# EAGLE board Home Automation Using IR Sensor (EAGLE 9.7.0)

Size 176.57 x 143.27 mm. Coordinates in mm from the lower left corner, seen from the top.
Outline: 0,0 176.57,0 176.57,143.27 0,143.27 0,0
Copper layers (1*16): Top 0.035mm / dielectric 1.5mm / Bottom 0.035mm
Design rules "default": minimum track width 6mil, minimum drill 0.35mm, track to track 6mil, track to pad 6mil, pad to pad 6mil, via to via 6mil, smd to smd 6mil, copper to edge 40mil, drill to drill 6mil, minimum pad ring 10mil, minimum via ring 8mil, stop-mask expansion 4mil, vias tented up to drill 0mil, thermal gap 10mil

## Footprints (pad centres in the part's own frame; a part is rotated, then mirrored left to right if it is on the bottom)
LED-RGB-5MM = drill 0.9: B 0.635,0.635; C -0.635,-0.635; G 1.905,-0.635; R -1.905,0.635
LU-5-R = drill 0.8: 1 -6.35,-3.81; 5 3.81,-3.81; 6 6.35,-3.81; 7 6.35,3.81; 8 3.81,3.81; 12 -6.35,3.81
MOTOR = drill 1.118 pad 3.15 octagon: + 2.54,0; - -2.54,0
BATTERY-GENERIC = drill 1.118 pad 3.15 octagon: + 2.54,0; - -2.54,0
RESAD1016W63L850D250B = drill 0.83 pad 1.43: 1 -5.08,0; 2 5.08,0
SWITCH-MOMENTARY-PTH-6.5MM = drill 1.016 pad 1.88: 1 -3.251,2.261; 2 3.251,2.261; 3 -3.251,-2.261; 4 3.251,-2.261
TSOP48 = drill 0.8: 1 -2.54,0; 2 0,0; 3 2.54,0
ARDUINO-UNO-R3-SHIELD = drill 1.016 pad 1.88: 3.3V 24.13,-2.54; 5V 24.13,0; A0 24.13,12.7; A1 24.13,15.24; A2 24.13,17.78; A3 24.13,20.32; A4 24.13,22.86; A5 24.13,25.4; AREF -24.13,-13.97; D2 -24.13,20.32; D3 -24.13,17.78; D4 -24.13,15.24; D5 -24.13,12.7; D6 -24.13,10.16; D7 -24.13,7.62; D8 -24.13,3.81; D9 -24.13,1.27; D10 -24.13,-1.27; D11 -24.13,-3.81; D12 -24.13,-6.35; D13 -24.13,-8.89; GND@0 24.13,2.54; GND@1 24.13,5.08; GND@2 -24.13,-11.43; IOREF 24.13,-7.62; NC 24.13,-10.16; RES 24.13,-5.08; RX -24.13,25.4; SCL -24.13,-19.05; SDA -24.13,-16.51; TX -24.13,22.86; VIN 24.13,7.62

## Placement (x,y rotation side)
D3  LED-RGBRCBG-PTH  [LED-RGB-5MM]  111.25,135.78 0 top
K1  RELAY-SPDT_LU-5-R  [LU-5-R]  105.43,65.83 180 top
K2  RELAY-SPDT_LU-5-R  [LU-5-R]  126.66,65.55 180 top
M1  MOTOR_HDR  [MOTOR]  132.86,111.98 0 top
M3  MOTOR_HDR  [MOTOR]  164.87,111.74 0 top
P1  BATTERYGENERIC  [BATTERY-GENERIC]  69.92,90.2 180 top
R1  1k  [RESAD1016W63L850D250B]  107.44,130.7 90 top
R2  1k  [RESAD1016W63L850D250B]  112.52,130.7 90 top
S1  SWITCH_MOMENTARY  [SWITCH-MOMENTARY-PTH-6.5MM]  106.56,26.49 90 top
S2  SWITCH_MOMENTARY  [SWITCH-MOMENTARY-PTH-6.5MM]  124.6,26.09 90 top
U1  IR-RECEIVERTSOP48  [TSOP48]  170.2,27.16 0 top
U2  ARDUINO-UNO-R3-SHIELD  [ARDUINO-UNO-R3-SHIELD]  29.84,34.52 180 top

## Library data of the parts
D3 K1 K2 M1 M3 P1 R1 R2 S1 S2 U1 U2 = Tinkercad

## Nets
D3_B: D3.B R2.2
D3_R: D3.R R1.2
M1_+: K1.6 M1.+ R1.1
M3_+: K2.6 M3.+ R2.1
P1+: K1.1 K1.12 K2.12 P1.+
P1-: D3.C M1.- M3.- P1.-
U2_5V: U1.3 U2.5V
U2_D3: U1.1 U2.D3
U2_D7: S2.3 U2.D7
U2_D8: S1.3 U2.D8
U2_D12: K2.8 U2.D12
U2_D13: K1.8 U2.D13
U2_GND: K1.5 K2.5 S1.2 S2.2 U1.2 U2.GND@0 U2.GND@1 U2.GND@2

## Tracks (layer width: path | path; a pad name or v marks a point on that pad's centre or on a via)
D3_B  (1 unrouted)
D3_R  (1 unrouted)
M1_+  (2 unrouted)
M3_+  (2 unrouted)
P1+  (3 unrouted)
P1-  (3 unrouted)
U2_5V  (1 unrouted)
U2_D3  (1 unrouted)
U2_D7  (1 unrouted)
U2_D8  (1 unrouted)
U2_D12  (1 unrouted)
U2_D13  (1 unrouted)
U2_GND  (7 unrouted)